# Altium PCB Atemgea_pcb.PcbDoc (part 2 of 2)
Units mm, origin at the board's own origin, x right, y up, seen from the top; angles counter-clockwise.
Board outline 68.58 x 53.34 mm, 2 copper layers (Top Layer, Bottom Layer); 105 components, 71 nets, 323 pads, 0 vias.
Unrouted connection lines stored in the file: 231.
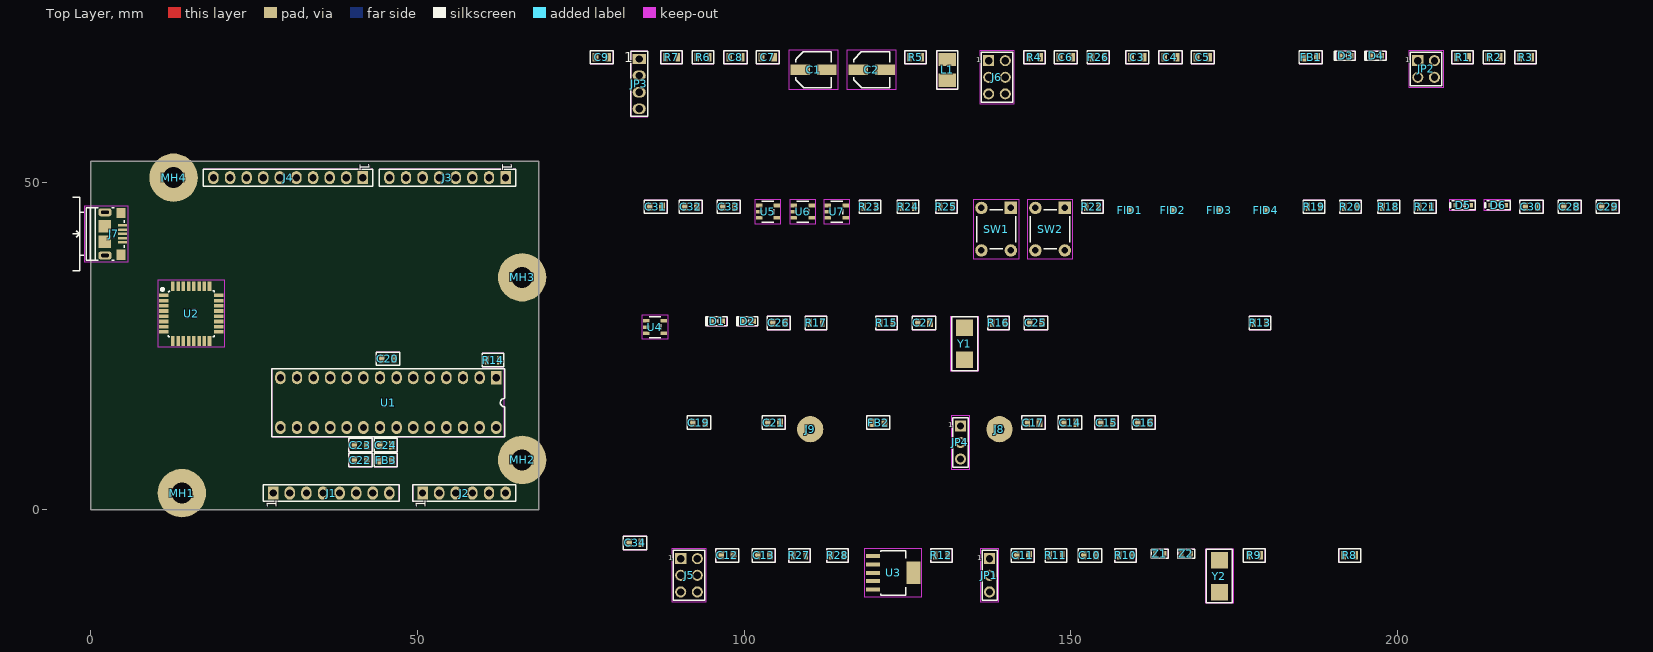
[diagram p0: Top Layer view]

## Part data (continued)
R1: library part RC0805FR-07100KL, "Res Thick Film 0805 100K Ohm 1% 1/8W ±100ppm/°C Molded SMD Paper T/R", Case Code (Imperial)=0805, Case Code (Metric)=2012, Manufacturer=Yageo, Max Operating Temperature=155°C, Max Power Dissipation=125mW, Min Operating Temperature=-55°C, Package Quantity=1, Resistance=100kR, Resistance Tolerance=1%, Resistor Type="Thick Film", Supplier Part Number 1=1995648, Temperature Coefficient=100ppm/°C, Voltage Rating=150V, Case/Package=0805, Category="Chip SMD Resistors", ComponentLink1Description=https://datasheet.ciiva.com/11808/0900766b8106beab-11808858.pdf?src-supplier=RSComponents, ComponentLink1URL=https://datasheet.ciiva.com/11808/0900766b8106beab-11808858.pdf?src-supplier=RSComponents, ComponentLink2Description=https://datasheet.ciiva.com/7941/1686128-7941677.pdf?src-supplier=Element14, ComponentLink2URL=https://datasheet.ciiva.com/7941/1686128-7941677.pdf?src-supplier=Element14, ComponentLink3Description=https://datasheet.ciiva.com/7660/38627-7660796.pdf?src-supplier=Element14, ComponentLink3URL=https://datasheet.ciiva.com/7660/38627-7660796.pdf?src-supplier=Element14, ComponentLink4Description=https://datasheet.ciiva.com/22747/444164-22747534.pdf?src-supplier=Element14, ComponentLink4URL=https://datasheet.ciiva.com/22747/444164-22747534.pdf?src-supplier=Element14, ComponentLink5Description=https://datasheet.ciiva.com/2457/pyu-r-int-thick-7-2457018.pdf?src-supplier=Digi-Key, ComponentLink5URL=https://datasheet.ciiva.com/2457/pyu-r-int-thick-7-2457018.pdf?src-supplier=Digi-Key, ComponentLink6Description=https://datasheet.ciiva.com/2457/pyu-r-int-thick-7-2457019.pdf?src-supplier=Digi-Key, ComponentLink6URL=https://datasheet.ciiva.com/2457/pyu-r-int-thick-7-2457019.pdf?src-supplier=Digi-Key, ComponentLink7Description=https://datasheet.ciiva.com/2457/pyu-r-int-thick-7-2457017.pdf?src-supplier=Digi-Key, ComponentLink7URL=https://datasheet.ciiva.com/2457/pyu-r-int-thick-7-2457017.pdf?src-supplier=Digi-Key, ComponentLink8Description=https://datasheet.ciiva.com/12667/rc0805-12667001.pdf?src-supplier=Mouser, ComponentLink8URL=https://datasheet.ciiva.com/12667/rc0805-12667001.pdf?src-supplier=Mouser, ComponentLink9Description=https://datasheet.ciiva.com/7941/1697719-7941676.pdf?src-supplier=Element14, ComponentLink9URL=https://datasheet.ciiva.com/7941/1697719-7941676.pdf?src-supplier=Element14, ComponentLink10Description=https://datasheet.ciiva.com/7941/1697719-7941678.pdf?src-supplier=Element14, ComponentLink10URL=https://datasheet.ciiva.com/7941/1697719-7941678.pdf?src-supplier=Element14, ComponentLink11Description=https://datasheet.ciiva.com/16747/rc0805-16747226.pdf?src-supplier=Future+Electronics, ComponentLink11URL=https://datasheet.ciiva.com/16747/rc0805-16747226.pdf?src-supplier=Future+Electronics, Construction=Rectangular, Depth=1.25mm, Features="Moisture Resistant", Height=0.024inch, Lead Free="Lead Free", Lead Pitch=0.4mm, Length=2mm, Manufacturer Part Number=RC0805FR-07100KL, Military Standard=Not, Number of Pins=2, Number of Terminations=2, Packaging="Tape and Reel", Power Rating=125mW, Pricing 1="5000=0.00400, 25000=0.00400, 50000=0.00400, 100000=0.00300, 200000=0.00300 (GBP)", REACH SVHC=Unknown, RoHS=Yes, RoHS Compliant=Yes, Series=RC, Size Code=0805, Stock 1=23600, Supplier 1=RSComponents, Technology="THICK FILM", Termination=SMD/SMT, Tolerance=1%, Voltage Rating (DC)=150V, Width=0.049inch
R2 R3 R15 R17 R22: library part RC0805FR-07560RL, "Res General Purpose Thick Film 0805 560 Ohm 1% 1/8W ±100ppm/°C Molded Paper T/R", Case Code (Imperial)=0805, Case Code (Metric)=2012, Manufacturer=Yageo, Max Operating Temperature=155°C, Max Power Dissipation=125mW, Min Operating Temperature=-55°C, Package Quantity=1, Resistance=560R, Resistance Tolerance=1%, Resistor Type="Thick Film", Supplier Part Number 1=311-560CRCT-ND, Temperature Coefficient=100ppm/°C, Voltage Rating=150V, Case/Package=0805, Category="Chip SMD Resistors", Construction=Rectangular, Depth=1.25mm, Features="Moisture Resistant", Height=0.024inch, Lead Free="Lead Free", Length=2mm, Manufacturer Part Number=RC0805FR-07560RL, Military Standard=Not, Number of Terminations=2, Packaging="Tape and Reel", Power Rating=125mW, Pricing 1="1=0.10000, 10=0.04200, 100=0.01690, 1000=0.00759, 2500=0.00659 (USD)", REACH SVHC=Unknown, RoHS=Yes, RoHS Compliant=Yes, Series=RC, Size Code=0805, Stock 1=450592, Supplier 1=Digi-Key, Termination=SMD/SMT, Tolerance=1%, Weight=0.000194oz, Width=0.049inch
R4 R14 R18 R19 R20 R21: library part RC0805FR-0710KL, "Res SMD 0805 10K 1% 0.125W T.C.100PPM", Case Code (Imperial)=0805, Case Code (Metric)=2012, Manufacturer=Yageo, Max Operating Temperature=155°C, Max Power Dissipation=125mW, Min Operating Temperature=-55°C, Package Quantity=1, Resistance=10kR, Resistance Tolerance=1%, Resistor Type="Thick Film", Supplier Part Number 1=311-10.0KCRTR-ND, Temperature Coefficient=100ppm/°C, Voltage Rating=150V, Case/Package=0805, Category="Chip SMD Resistors", Construction=Rectangular, Depth=1.25mm, Features="Moisture Resistant", Height=0.024inch, Lead Free="Lead Free", Length=2mm, Manufacturer Part Number=RC0805FR-0710KL, Military Standard=Not, Number of Terminations=2, Packaging="Tape and Reel", Power Rating=125mW, Pricing 1="5000=0.00544 (USD)", REACH SVHC=Unknown, RoHS=Yes, RoHS Compliant=Yes, Series=RC, Size Code=0805, Stock 1=1849576, Supplier 1=Digi-Key, Technology="THICK FILM", Termination=SMD/SMT, Tolerance=1%, Width=0.049inch
R5 R6 R7 R13 R23 R24 R25: library part RC0805FR-0722RL, "Res SMD 0805 22R 1% 0.125W T.C.100PPM", Case Code (Imperial)=0805, Case Code (Metric)=2012, Manufacturer=Yageo, Max Operating Temperature=155°C, Max Power Dissipation=125mW, Min Operating Temperature=-55°C, Package Quantity=1, Resistance=22R, Resistance Tolerance=1%, Resistor Type="Thick Film", Supplier Part Number 1=311-22.0CRCT-ND, Temperature Coefficient=100ppm/°C, Voltage Rating=150V, Case/Package=0805, Category="Chip SMD Resistors", ComponentLink1Description=https://datasheet.ciiva.com/11819/0900766b8106beab-11819837.pdf?src-supplier=RSComponents, ComponentLink1URL=https://datasheet.ciiva.com/11819/0900766b8106beab-11819837.pdf?src-supplier=RSComponents, ComponentLink2Description=https://datasheet.ciiva.com/46447/444164-46447574.pdf?src-supplier=Element14, ComponentLink2URL=https://datasheet.ciiva.com/46447/444164-46447574.pdf?src-supplier=Element14, ComponentLink3Description=https://datasheet.ciiva.com/2457/pyu-r-int-thick-7-2457045.pdf?src-supplier=Digi-Key, ComponentLink3URL=https://datasheet.ciiva.com/2457/pyu-r-int-thick-7-2457045.pdf?src-supplier=Digi-Key, ComponentLink4Description=https://datasheet.ciiva.com/2457/pyu-r-int-thick-7-2457046.pdf?src-supplier=Digi-Key, ComponentLink4URL=https://datasheet.ciiva.com/2457/pyu-r-int-thick-7-2457046.pdf?src-supplier=Digi-Key, ComponentLink5Description=https://datasheet.ciiva.com/2457/pyu-r-int-thick-7-2457044.pdf?src-supplier=Digi-Key, ComponentLink5URL=https://datasheet.ciiva.com/2457/pyu-r-int-thick-7-2457044.pdf?src-supplier=Digi-Key, ComponentLink6Description=https://datasheet.ciiva.com/12667/rc0805-12667371.pdf?src-supplier=Mouser, ComponentLink6URL=https://datasheet.ciiva.com/12667/rc0805-12667371.pdf?src-supplier=Mouser, Construction=Rectangular, Depth=1.25mm, Features="Moisture Resistant", Height=0.024inch, Lead Free="Lead Free", Length=0.079inch, Manufacturer Part Number=RC0805FR-0722RL, Military Standard=Not, Number of Terminations=2, Packaging="Tape and Reel", Power Rating=125mW, Pricing 1="1=0.10000, 10=0.04200, 100=0.01690, 1000=0.00759, 2500=0.00659 (USD)", REACH SVHC=Unknown, RoHS=Yes, RoHS Compliant=Yes, Series=RC, Stock 1=203007, Supplier 1=Digi-Key, Technology="THICK FILM", Termination=SMD/SMT, Tolerance=1%, Width=0.049inch, Working Voltage=150V
R8 R26 R27 R28: library part RC0805JR-070RL, "RC Series 0805 0.125 W 0 Ohm Jumper Surface Mount Thick Film Chip Resistor", Case Code (Imperial)=0805, Case Code (Metric)=2012, Manufacturer=Yageo, Max Operating Temperature=155°C, Max Power Dissipation=125mW, Min Operating Temperature=-55°C, Resistance=0mR, Resistance Tolerance=5%, Resistor Type="Thick Film", Supplier Part Number 1=311-0.0ARCT-ND, Temperature Coefficient=200ppm/°C, Voltage Rating=150V, Case/Package=0805, Category="Chip SMD Resistors", ComponentLink1Description=https://datasheet.ciiva.com/7941/1738694-7941861.pdf?src-supplier=Element14, ComponentLink1URL=https://datasheet.ciiva.com/7941/1738694-7941861.pdf?src-supplier=Element14, ComponentLink2Description=https://datasheet.ciiva.com/11819/0900766b8106beab-11819430.pdf?src-supplier=RSComponents, ComponentLink2URL=https://datasheet.ciiva.com/11819/0900766b8106beab-11819430.pdf?src-supplier=RSComponents, ComponentLink3Description=https://datasheet.ciiva.com/7941/1738694-7941862.pdf?src-supplier=Element14, ComponentLink3URL=https://datasheet.ciiva.com/7941/1738694-7941862.pdf?src-supplier=Element14, ComponentLink4Description=https://datasheet.ciiva.com/7941/1738694-7941863.pdf?src-supplier=Element14, ComponentLink4URL=https://datasheet.ciiva.com/7941/1738694-7941863.pdf?src-supplier=Element14, ComponentLink5Description=https://datasheet.ciiva.com/15190/getdatasheetpartid-330685-15190028.pdf?src-supplier=Verical, ComponentLink5URL=https://datasheet.ciiva.com/15190/getdatasheetpartid-330685-15190028.pdf?src-supplier=Verical, Construction=Rectangular, Contact Plating=Tin,Matte, Depth=1.25mm, Features="Moisture Resistant", Height=0.5mm, Lead Free="Lead Free", Length=2mm, Manufacturer Part Number=RC0805JR-070RL, Military Standard=Not, Number of Pins=2, Number of Terminations=2, Packaging="Tape and Reel", Power Rating=125mW, Pricing 1="1=0.10000, 10=0.03100, 25=0.02240, 50=0.01720, 100=0.01260, 250=0.00964, 500=0.00770, 1000=0.00567 (USD)", Radiation Hardening=No, REACH SVHC=Unknown, RoHS=Yes, RoHS Compliant=Yes, Series=RC, Size Code=0805, Stock 1=3244701, Supplier 1=Digi-Key, Technology="THICK FILM", Termination=SMD/SMT, Tolerance=5%, Voltage Rating (DC)=150V, Width=1.25mm
R9 R16: library part RC0805FR-071ML, "Res Thick Film 0805 1M Ohm 1% 0.125W(1/8W) ±100ppm/C Pad SMD T/R", Case/Package=0805, Manufacturer="Yageo Phycomp", Max Operating Temperature=155°C, Min Operating Temperature=-55°C, Power Rating=125mW, Resistance=1MR, Supplier Part Number 1=311-1.00MCRCT-ND, Temperature Coefficient=100ppm/°C, Tolerance=1%, Voltage Rating (DC)=150V, Category="Chip SMD Resistors", ComponentLink1Description=http://www.farnell.com/datasheets/2167052.pdf?src-supplier=Farnell, ComponentLink1URL=http://www.farnell.com/datasheets/2167052.pdf?src-supplier=Farnell, ComponentLink2Description=http://www.mouser.com/ds/2/447/Yageo_08112016_RC0805-968729.pdf?src-supplier=Mouser, ComponentLink2URL=http://www.mouser.com/ds/2/447/Yageo_08112016_RC0805-968729.pdf?src-supplier=Mouser, ComponentLink3Description=http://www.farnell.com/datasheets/444164.pdf?src-supplier=Element14, ComponentLink3URL=http://www.farnell.com/datasheets/444164.pdf?src-supplier=Element14, ComponentLink4Description=http://www.farnell.com/datasheets/2167052.pdf?src-supplier=Newark, ComponentLink4URL=http://www.farnell.com/datasheets/2167052.pdf?src-supplier=Newark, ComponentLink5Description=http://www.yageo.com/documents/recent/PYu-RC_Group_51_RoHS_L_10.pdf?src-supplier=Digi-Key, ComponentLink5URL=http://www.yageo.com/documents/recent/PYu-RC_Group_51_RoHS_L_10.pdf?src-supplier=Digi-Key, Depth=1.25mm, Height=0.5mm, Lead Free="Lead Free", Length=2mm, Manufacturer Part Number=RC0805FR-071ML, Mount="Surface Mount", Number of Pins=2, Packaging="Cut Tape", Pricing 1="1=0.10000, 10=0.04200, 100=0.01690, 1000=0.00759, 2500=0.00659 (USD)", REACH SVHC="No SVHC", RoHS=Yes, Stock 1=541444, Supplier 1=Digi-Key, Width=1.25mm
R10 R11 R12: library part RC0805FR-071KL, "Res Thick Film 0805 1KOhm 1% 0.125W(1/8W) 100ppm/C Epoxy Pad SMD T/R", Case Code (Imperial)=0805, Case Code (Metric)=2012, Manufacturer=Yageo, Max Operating Temperature=155°C, Max Power Dissipation=125mW, Min Operating Temperature=-55°C, Package Quantity=1, Resistance=1kR, Resistance Tolerance=1%, Resistor Type="Thick Film", Supplier Part Number 1=311-1.00KCRTR-ND, Temperature Coefficient=100ppm/°C, Voltage Rating=150V, Case/Package=0805, Category="Chip SMD Resistors", Construction=Rectangular, Depth=1.25mm, Features="Moisture Resistant", Height=0.024inch, Lead Free="Lead Free", Length=0.079inch, Manufacturer Part Number=RC0805FR-071KL, Military Standard=Not, Number of Pins=2, Number of Terminations=2, Packaging="Tape and Reel", Power Rating=125mW, Pricing 1="5000=0.00544 (USD)", REACH SVHC=Unknown, RoHS=Yes, RoHS Compliant=Yes, Series=RC, Size Code=0805, Stock 1=5664551, Supplier 1=Digi-Key, Termination=SMD/SMT, Tolerance=1%, Voltage Rating (DC)=150V, Width=0.049inch
SW1 SW2: "Switch Tactile OFF (ON) SPST Round Button PC Pins 0.05A 24VDC 1.57N Thru-Hole Loose", Actuator Color=Black, Contact Current Rating=50mA, Contact Resistance=100mR, Manufacturer="TE Connectivity Alcoswitch", Max Operating Temperature=85°C, Max Voltage Rating (DC)=24V, Min Operating Temperature=-35°C, Operating Force=160gf, Package Quantity=750, Supplier Part Number 1=450-1650-ND, Actuator Length=0.055inch, Actuator Material=PBT, Actuator Type=Standard, Category="Pushbutton Switches", ComponentLink1Description=https://datasheet.ciiva.com/30199/1825910-6rqpn1825910-6-30199520.pdf?src-supplier=Onlinecomponents.com, ComponentLink1URL=https://datasheet.ciiva.com/30199/1825910-6rqpn1825910-6-30199520.pdf?src-supplier=Onlinecomponents.com, ComponentLink2Description=https://datasheet.ciiva.com/15184/getdatasheetpartid-395915-15184509.pdf?src-supplier=Verical, ComponentLink2URL=https://datasheet.ciiva.com/15184/getdatasheetpartid-395915-15184509.pdf?src-supplier=Verical, Contact Material="Copper Alloy", Contact Plating=Silver, Electrical Life=100000Cycles, ELV=Compliant, Illumination Type=Non-Illuminated,Illuminated, Lead Free="Lead Free", Length=5.99mm, Manufacturer Part Number=1825910-6, Max Current Rating=50mA, Mechanical Life=100000Cycles, Mount="Through Hole", Orientation=Straight, Packaging="Loose Piece", Pricing 1="1=0.12000, 10=0.11300, 25=0.10720, 100=0.09750, 250=0.09164, 500=0.08382, 1000=0.07018, 2500=0.06823, 5000=0.06433 (USD)", REACH SVHC=Unknown, RoHS=Yes, RoHS Compliant=Yes, Series=FSMJ, Stock 1=147083, Supplier 1=Digi-Key, Switch Function=Off-Mom, Switch Travel=0.25mm, Termination="PC Pins", Throw Configuration=SPST, Type=Switch
U1: "ATMEGA328P-PU; 8 bit Microcontroller AVR 20MHz 1; 32kb Flash; 2kb RAM; I2C SPI 2", Case/Package=PDIP, Frequency=20MHz, Manufacturer="Microchip / Atmel", Max Operating Temperature=85°C, Max Supply Voltage=5.5V, Min Operating Temperature=-40°C, Min Supply Voltage=1.8V, Package Quantity=14, Category=Microcontrollers, ComponentLink1Description=https://datasheet.ciiva.com/19457/2139111-19457070.pdf?src-supplier=Jameco, ComponentLink1URL=https://datasheet.ciiva.com/19457/2139111-19457070.pdf?src-supplier=Jameco, ComponentLink2Description=https://datasheet.ciiva.com/1157/1684409-1157696.pdf?src-supplier=Element14, ComponentLink2URL=https://datasheet.ciiva.com/1157/1684409-1157696.pdf?src-supplier=Element14, ComponentLink3Description=https://datasheet.ciiva.com/20168/73-4283-20168380.pdf?src-supplier=Rapid+Electronics, ComponentLink3URL=https://datasheet.ciiva.com/20168/73-4283-20168380.pdf?src-supplier=Rapid+Electronics, ComponentLink4Description=https://datasheet.ciiva.com/29119/155197-da-01-en-microcontr-atmega328p-pu-8bit-pdip-28-29119593.pdf?src-supplier=Conrad, ComponentLink4URL=https://datasheet.ciiva.com/29119/155197-da-01-en-microcontr-atmega328p-pu-8bit-pdip-28-29119593.pdf?src-supplier=Conrad, ComponentLink5Description=https://datasheet.ciiva.com/26818/atmega328p-pu-26818578.pdf?src-supplier=IIIC, ComponentLink5URL=https://datasheet.ciiva.com/26818/atmega328p-pu-26818578.pdf?src-supplier=IIIC, ComponentLink6Description=https://datasheet.ciiva.com/15213/getdatasheetpartid-318533-15213133.pdf?src-supplier=Verical, ComponentLink6URL=https://datasheet.ciiva.com/15213/getdatasheetpartid-318533-15213133.pdf?src-supplier=Verical, Contact Plating=Tin,Matte, Core Architecture=AVR, Data Bus Width=8b, Height=3.28mm, Interface=I2C,SPI,UART,USART,2-Wire, Lead Free="Lead Free", Length=37.4mm, Manufacturer Part Number=ATMEGA328P-PU, Max Frequency=20MHz, Memory Size=32KB, Memory Type=FLASH, Mount="Through Hole", Number of ADC Channels=6, Number of I2C Channels=1, Number of I/Os=23, Number of Pins=28, Number of Programmable I/O=23, Number of PWM Channels=6, Number of SPI Channels=1, Number of Timers/Counters=3, Oscillator Type=Internal, Packaging=Rail/Tube, Peripherals="Brown-out Detect/Reset,POR,PWM,WDT", Radiation Hardening=No, RAM Size=2KB, REACH SVHC="No SVHC", RoHS=Yes, RoHS Compliant=Yes, Series="AVR® ATmega", Supplier 1="Allied Electronics", Supplier Part Number 1=ATMEGA328P-PU, Watchdog Timer=Yes, Width=6.76mm
U2: "8-bit AVR MCU, 16 KB, 512 Bytes, 16 MHz, 2.7 to 5.5V, TQFP-32, RoHS", Case/Package=A, Frequency=16MHz, Manufacturer="Microchip / Atmel", Max Operating Temperature=85°C, Max Supply Voltage=5.5V, Min Operating Temperature=-40°C, Min Supply Voltage=2.7V, Package Quantity=1250, Category=Microcontrollers, ComponentLink1Description=https://datasheet.ciiva.com/13036/doc7799-28769-13036800.pdf?src-supplier=Mouser, ComponentLink1URL=https://datasheet.ciiva.com/13036/doc7799-28769-13036800.pdf?src-supplier=Mouser, ComponentLink2Description=https://datasheet.ciiva.com/22651/doc7799-22651110.pdf?src-supplier=Farnell, ComponentLink2URL=https://datasheet.ciiva.com/22651/doc7799-22651110.pdf?src-supplier=Farnell, Contact Plating=Tin,Matte, Core Architecture=AVR, Data Bus Width=8b, Height=1.05mm, Interface=SPI,UART,USB,USART,Serial, Lead Free="Lead Free", Length=7mm, Manufacturer Part Number=ATMEGA16U2-AU, Max Frequency=16MHz, Memory Size=16KB, Memory Type=FLASH, Mount="Surface Mount", Number of I/Os=22, Number of Pins=32, Number of Programmable I/O=22, Number of PWM Channels=5, Number of SPI Channels=1, Number of Timers/Counters=2, Oscillator Type=Internal, Packaging=Tray, Peripherals="Brown-out Detect/Reset,POR,PWM,WDT", RAM Size=512B, REACH SVHC="No SVHC", RoHS=Yes, RoHS Compliant=Yes, Series="AVR® ATmega", Supplier 1="Arrow Electronics", Supplier Part Number 1=ATMEGA16U2-AU, Watchdog Timer=Yes, Width=7mm
U3: "LDO Regulator Pos 3.3V 1.5A 6-Pin(5+Tab) SOT-223 T/R", Case/Package=SOT-223, Dropout Voltage=340mV, Input Bias Current=1mA, Manufacturer="Texas Instruments", Max Input Voltage=20V, Max Operating Temperature=125°C, Max Output Current=1.5A, Max Output Voltage=3.3V, Min Current Limit=1.6A, Min Input Voltage=2.1V, Min Operating Temperature=-40°C, Package Quantity=1, Supplier Part Number 1=296-24534-6-ND, Accuracy=3%, Category="Voltage Regulators - Linear", ComponentLink1Description=https://datasheet.ciiva.com/2046/tl1963a-2046161.pdf?src-supplier=Digi-Key, ComponentLink1URL=https://datasheet.ciiva.com/2046/tl1963a-2046161.pdf?src-supplier=Digi-Key, ComponentLink2Description=https://datasheet.ciiva.com/2046/tl1963a-2046162.pdf?src-supplier=Digi-Key, ComponentLink2URL=https://datasheet.ciiva.com/2046/tl1963a-2046162.pdf?src-supplier=Digi-Key, ComponentLink3Description=https://datasheet.ciiva.com/2046/tl1963a-2046163.pdf?src-supplier=Digi-Key, ComponentLink3URL=https://datasheet.ciiva.com/2046/tl1963a-2046163.pdf?src-supplier=Digi-Key, ComponentLink4Description=https://datasheet.ciiva.com/26176/tl1963a-25-26176569.pdf?src-supplier=Avnet+Europe, ComponentLink4URL=https://datasheet.ciiva.com/26176/tl1963a-25-26176569.pdf?src-supplier=Avnet+Europe, Contact Plating=Gold, Lead Free="Lead Free", Manufacturer Part Number=TL1963A-33DCQR, Min Output Voltage=3.3V, Number of Outputs=1, Number of Pins=6, Number of Regulators=1, Output Current=1.5A, Output Type=Fixed, Output Voltage=3.3V, Packaging="Tape and Reel", Polarity=Positive, Pricing 1="1=3.62000, 10=3.25200, 25=3.07440, 100=2.66440, 250=2.52772, 500=2.26812, 1000=2.25575 (USD)", Quiescent Current=1mA, Radiation Hardening=No, RoHS=Yes, RoHS Compliant=Yes, Series=-, Supplier 1=Digi-Key
U4 U5 U6 U7: "Single 2-input, 2-V to 5.5-V AND gate with open-drain outputs 5-SOT-23 -55 to 125", Case/Package=SOT-23, Low Level Output Current=8mA, Manufacturer="Texas Instruments", Max Operating Temperature=125°C, Max Supply Voltage=5.5V, Min Operating Temperature=-55°C, Min Supply Voltage=2V, Output Current=25mA, Package Quantity=3000, Quiescent Current=1uA, Supplier Part Number 1=296-29202-1-ND, Category="Logic Gates", ComponentLink1Description=https://datasheet.ciiva.com/1864/sn74ahc1g09-1864410.pdf?src-supplier=Digi-Key, ComponentLink1URL=https://datasheet.ciiva.com/1864/sn74ahc1g09-1864410.pdf?src-supplier=Digi-Key, ComponentLink2Description=https://datasheet.ciiva.com/1864/sn74ahc1g09-1864411.pdf?src-supplier=Digi-Key, ComponentLink2URL=https://datasheet.ciiva.com/1864/sn74ahc1g09-1864411.pdf?src-supplier=Digi-Key, ComponentLink3Description=https://datasheet.ciiva.com/1864/sn74ahc1g09-1864412.pdf?src-supplier=Digi-Key, ComponentLink3URL=https://datasheet.ciiva.com/1864/sn74ahc1g09-1864412.pdf?src-supplier=Digi-Key, Contact Plating=Tin,Matte, Lead Free="Lead Free", Logic Function="AND GATE", Manufacturer Part Number=SN74AHC1G09DBVR, Mount="Surface Mount", Number of Bits=1, Number of Circuits=1, Number of Elements=1, Number of Gates=1, Number of Inputs=2, Number of Outputs=1, Number of Pins=5, Output Voltage=5.5V, Packaging="Tape and Reel", Pricing 1="1=0.48000, 10=0.35600, 25=0.31160, 100=0.20170, 250=0.16696, 500=0.13356, 1000=0.10240 (USD)", Propagation Delay=7.5ns, Radiation Hardening=No, REACH SVHC="No SVHC", RoHS=Yes, RoHS Compliant=Yes, Series=74AHC, Supplier 1=Digi-Key, Technology=CMOS
Y1 Y2: "Crystal 16MHz ±20ppm (Tol) ±30ppm (Stability) 18pF FUND 50Ohm 2-Pin Mini-CSMD T/R", Case/Package=CSMD, ESR (Equivalent Series Resistance)=50R, Frequency=16MHz, Frequency Stability=30ppm, Frequency Tolerance=20ppm, Load Capacitance=18pF, Manufacturer=Abracon, Max Operating Temperature=85°C, Min Operating Temperature=-40°C, Package Quantity=1000, Resistor Type=Ceramic, Supplier Part Number 1=1710290, Category=Crystals, ComponentLink1Description=https://datasheet.ciiva.com/15116/getdatasheetpartid-721624-15116835.pdf?src-supplier=Verical, ComponentLink1URL=https://datasheet.ciiva.com/15116/getdatasheetpartid-721624-15116835.pdf?src-supplier=Verical, ComponentLink2Description=https://datasheet.ciiva.com/22658/947971-22658293.pdf?src-supplier=Element14, ComponentLink2URL=https://datasheet.ciiva.com/22658/947971-22658293.pdf?src-supplier=Element14, ComponentLink3Description=https://datasheet.ciiva.com/5788/abm7-5788054.pdf?src-supplier=Farnell, ComponentLink3URL=https://datasheet.ciiva.com/5788/abm7-5788054.pdf?src-supplier=Farnell, ComponentLink4Description=https://datasheet.ciiva.com/7998/947971-7998600.pdf?src-supplier=Element14, ComponentLink4URL=https://datasheet.ciiva.com/7998/947971-7998600.pdf?src-supplier=Element14, ComponentLink5Description=https://datasheet.ciiva.com/46385/947971-46385243.pdf?src-supplier=Element14, ComponentLink5URL=https://datasheet.ciiva.com/46385/947971-46385243.pdf?src-supplier=Element14, ComponentLink6Description=https://datasheet.ciiva.com/16383/abm7-16383174.pdf?src-supplier=Future+Electronics, ComponentLink6URL=https://datasheet.ciiva.com/16383/abm7-16383174.pdf?src-supplier=Future+Electronics, ComponentLink7Description=https://datasheet.ciiva.com/18649/abm7-18649865.pdf?src-supplier=Digi-Key, ComponentLink7URL=https://datasheet.ciiva.com/18649/abm7-18649865.pdf?src-supplier=Digi-Key, ComponentLink8Description=https://datasheet.ciiva.com/18649/abm7-18649866.pdf?src-supplier=Digi-Key, ComponentLink8URL=https://datasheet.ciiva.com/18649/abm7-18649866.pdf?src-supplier=Digi-Key, ComponentLink9Description=https://datasheet.ciiva.com/18649/abm7-18649867.pdf?src-supplier=Digi-Key, ComponentLink9URL=https://datasheet.ciiva.com/18649/abm7-18649867.pdf?src-supplier=Digi-Key, ComponentLink10Description=https://datasheet.ciiva.com/26941/getdatasheetpartid-719818-26941724.pdf?src-supplier=Verical, ComponentLink10URL=https://datasheet.ciiva.com/26941/getdatasheetpartid-719818-26941724.pdf?src-supplier=Verical, Depth=3.5mm, Height=0.055inch, Lead Free="Lead Free", Length=6mm, Manufacturer Part Number=ABM7-16.000MHZ-D2Y-T, Mount="Surface Mount", Number of Pins=2, Packaging="Tape and Reel", Pricing 1="1000=0.52200, 3000=0.50800 (USD)", Radiation Hardening=No, REACH SVHC=Unknown, RoHS=Yes, Stock 1=710, Supplier 1=RSComponents, Termination=SMD/SMT, Tolerance=20ppm, Width=3.3mm
Z1 Z2: "ESD Suppressor Multilayer Varistor 5V Automotive 2-Pin Case 0603(1608Metric) T/R", Capacitance=0.5pF, Case Code (Imperial)=0603, Case Code (Metric)=1608, Clamping Voltage=20V, Current Rating=50nA, Manufacturer=Bourns, Max Operating Temperature=85°C, Max Voltage Rating (DC)=5V, Min Operating Temperature=-40°C, Package Quantity=1, Supplier Part Number 1=CG0603MLC-05ETR-ND, Voltage Rating (AC)=8V, Case/Package=0603, Category=Varistors, ComponentLink1Description=https://datasheet.ciiva.com/27747/1163231-27747629.pdf?src-supplier=Jameco, ComponentLink1URL=https://datasheet.ciiva.com/27747/1163231-27747629.pdf?src-supplier=Jameco, ComponentLink2Description=https://datasheet.ciiva.com/30070/mlc-30070503.pdf?src-supplier=Onlinecomponents.com, ComponentLink2URL=https://datasheet.ciiva.com/30070/mlc-30070503.pdf?src-supplier=Onlinecomponents.com, ComponentLink3Description=https://datasheet.ciiva.com/6991/mlc-6991832.pdf?src-supplier=Digi-Key, ComponentLink3URL=https://datasheet.ciiva.com/6991/mlc-6991832.pdf?src-supplier=Digi-Key, ComponentLink4Description=https://datasheet.ciiva.com/6991/mlc-6991834.pdf?src-supplier=Digi-Key, ComponentLink4URL=https://datasheet.ciiva.com/6991/mlc-6991834.pdf?src-supplier=Digi-Key, ComponentLink5Description=https://datasheet.ciiva.com/6991/mlc-6991836.pdf?src-supplier=Digi-Key, ComponentLink5URL=https://datasheet.ciiva.com/6991/mlc-6991836.pdf?src-supplier=Digi-Key, ComponentLink6Description=https://datasheet.ciiva.com/1278/1785244-1278701.pdf?src-supplier=Element14, ComponentLink6URL=https://datasheet.ciiva.com/1278/1785244-1278701.pdf?src-supplier=Element14, ComponentLink7Description=https://datasheet.ciiva.com/22696/1785244-22696318.pdf?src-supplier=Element14, ComponentLink7URL=https://datasheet.ciiva.com/22696/1785244-22696318.pdf?src-supplier=Element14, ComponentLink8Description=https://datasheet.ciiva.com/25958/mlc-25958222.pdf?src-supplier=Avnet+Europe, ComponentLink8URL=https://datasheet.ciiva.com/25958/mlc-25958222.pdf?src-supplier=Avnet+Europe, ComponentLink9Description=https://datasheet.ciiva.com/8084/mlc-8084047.pdf?src-supplier=Avnet, ComponentLink9URL=https://datasheet.ciiva.com/8084/mlc-8084047.pdf?src-supplier=Avnet, Contact Plating=Tin, Depth=0.8mm, Element Configuration=Single, Leakage Current=50nA, Length=1.6mm, Manufacturer Part Number=CG0603MLC-05E, Number of Channels=1, Number of Circuits=1, Number of Pins=2, Operating Supply Voltage=5V, Packaging="Tape and Reel", Pricing 1="5000=0.08840, 10000=0.08060, 25000=0.07540, 50000=0.06916 (USD)", Radiation Hardening=No, REACH SVHC="No SVHC", RoHS=Yes, RoHS Compliant=Yes, Series=MLC, Stock 1=69840, Supplier 1=Digi-Key, Termination=SMD/SMT, Thickness=0.8mm, Turn-On Delay Time=1ns, Voltage=5V, Voltage Rating (DC)=5V, Width=0.8mm, Working Voltage=5V

## Nets (pads, with @x,y where several pads share a name; then routed paths per layer and width w, separated by ;. In a path a pad name is that pad's centre, name@x,y a point inside that pad or via, vN(x,y) a via of type N, cw(c..) or ccw(c..) an arc to the next point about the centre after c; other vN are vias at no path point)
"16U2 MISO": J6.1 U2.17
"16U2 PB5": JP2.3 U2.19
"16U2 PB6": JP2.2 U2.20
"16U2 PB7": JP2.4 U2.21
"16U2 RXD": R11.1 U2.8
"16U2 RXD_LED": D4.1 U2.10
"16U2 SCLK": J6.3 R5.2
"16U2 SCLK_R": R5.1 U2.15
"16U2 TXD": R10.1 U2.9
"16U2 TXD_LED": D3.1 U2.11
16U2_BUF_RSTn: C31.2 R23.2 U5.1 U5.2
16U2_HDR_RESET: J6.5 JP3.3
16U2_MOSI: J6.4 U2.16
16U2_PB4: JP2.1 JP3.2 U2.18
16U2_PROG_RST: JP1.2 R1.1 U2.13
16U2_RESET: JP3.4 R4.1 U2.24 U5.4
328P_16MHz_XTAL1: C27.2 R16.1 U1.9 Y1.1
328P_16MHz_XTAL2: C25.2 R16.2 U1.10 Y1.2
328P_AUTO_RSTn: C11.1 R18.1 U6.1
328P_BUF_RSTn: C32.2 R24.2 U6.2
328P_RESET: J1.3 J5.5 JP3.1 R14.1 U1.1 U6.4
+3V3: C13.2 C16.2 J1.4 JP4.1 R28.2 U3.4 U3.5
"+3V3 16U2 UCAP": C7.2 R26.2 U2.27
+5/3V3: C8.2 C15.2 C17.2 C26.2 C28.2 C29.2 C30.2 C34.2 D5.1 D6.1 FB1.1 FB2.1 FB3.1 J1.2 J5.2 J6.2 JP4.2 R1.2 R2.2 R3.2 R4.2 R14.2 R15.2 R17.2 R18.2 R19.2 R20.2 R21.2 R27.2 R28.1 U4.5 U5.5 U6.5 U7.5
"+5/3V3 16U2": C3.2 C4.2 C5.2 FB1.2 R26.1 U2.4
"+5/3V3 328P AVCC": C22.2 C23.2 FB3.2 U1.20
"+5/3V3 328P VCC": FB2.2 U1.7
+5V: C2.1 C12.2 J1.5 J8.1 JP4.3 L1.2 R27.1 U2.32 U3.1 U3.2
+5V_USB: C1.1 J7.1 L1.1
+AREF: C21.2 C24.2 J4.8 U1.21
AD0: J2.1 U1.23
AD1: J2.2 U1.24
AD2: J2.3 U1.25
AD3: J2.4 U1.26
AD4/SDA: J2.5 J4.9 U1.27
AD5/SCL: J2.6 J4.10 U1.28
BTN_RSTn: D6.2 R20.1 R24.1 SW1.1 SW1.2
CON_USB_N: J7.2 R6.1 Z2.2
CON_USB_P: J7.3 R7.1 Z1.2
GND: C1.2 C2.2 C3.1 C4.1 C5.1 C6.1 C7.1 C8.1 C9.1 C10.1 C12.1 C13.1 C14.1 C15.1 C16.1 C17.1 C19.1 C20.1 C21.1 C22.1 C23.1 C24.1 C25.1 C26.1 C27.1 C28.1 C29.1 C30.1 C31.1 C32.1 C33.1 C34.1 D1.1 J1.6 J1.7 J4.7 J5.6 J6.6 J7.5 J7.6 J7.7 J7.8 J7.9 J7.10 J7.11 J9.1 MH1.1 MH2.1 MH3.1 R8.2 R12.1 SW1.3 SW1.4 SW2.3 SW2.4 U1.8 U1.22 U2.3 U2.28 U3.3 U3.6 U4.3 U5.3 U6.3 U7.3 Z1.1 Z2.1
IO0: J3.1 R10.2 U1.2
IO1: J3.2 R11.2 U1.3
IO2: J3.3 U1.4
IO3: J3.4 U1.5
IO4: J3.5 U1.6
IO5: J3.6 U1.11
IO6: J3.7 U1.12
IO7: J3.8 U1.13
IO8: J4.1 R22.2 U1.14
IO9: J4.2 U1.15
MISO: J4.5 J5.1 U1.18
MOSI: J4.4 J5.4 U1.17
NetC9_2: C9.2 R9.2 U2.2 Y2.2
NetC10_2: C10.2 R9.1 U2.1 Y2.1
NetC11_2: C11.2 JP1.1
NetD1_2: D1.2 R17.1
NetD2_1: D2.1 U4.4
NetD2_2: D2.2 R15.1
NetD3_2: D3.2 R2.1
NetD4_2: D4.2 R3.1
NetD5_2: D5.2 R19.1 R23.1
NetJ7_4: J7.4 R8.1
NetJP1_3: JP1.3 R12.2
NetR22_1: R22.1 U7.4
SCK: J4.6 J5.3 R13.2 U4.1 U4.2
SCK_R: R13.1 U1.19
SS: J4.3 U1.16
USB_N: R6.2 U2.30
USB_P: R7.2 U2.29
USER_BUTTON: R21.1 R25.1 SW2.1 SW2.2
USER_BUTTON_BUFF: C33.2 R25.2 U7.1 U7.2
pads on no net: C6.2 C14.2 C19.2 C20.2 FID1.1 FID2.1 FID3.1 FID4.1 J1.1 J1.8 MH4.1 U2.5 U2.6 U2.7 U2.12 U2.14 U2.22 U2.23 U2.25 U2.26 U2.31

## Text inside footprints (layer, text, board x,y; h text height)
J1: Top Overlay "1" at 28.448,0.254 h1.52 r90
J2: Top Overlay "1" at 51.308,0.254 h1.52 r90
J3: Top Overlay "1" at 62.992,53.086 h1.52 r270
J4: Top Overlay "1" at 41.148,53.086 h1.52 r270
J5: Top Overlay "1" at 88.417,-7.722 h0.76
J6: Top Overlay "1" at 135.534,68.478 h0.76
JP1: Top Overlay "1" at 135.661,-7.722 h0.76
JP2: Top Overlay "1" at 201.193,68.478 h0.76
JP3: Top Overlay "1" at 81.661,68.453 h1.52
JP4: Top Overlay "1" at 131.216,12.598 h0.76